# EAGLE board MainBoard_new_print (EAGLE 6.3), part 1 of 2
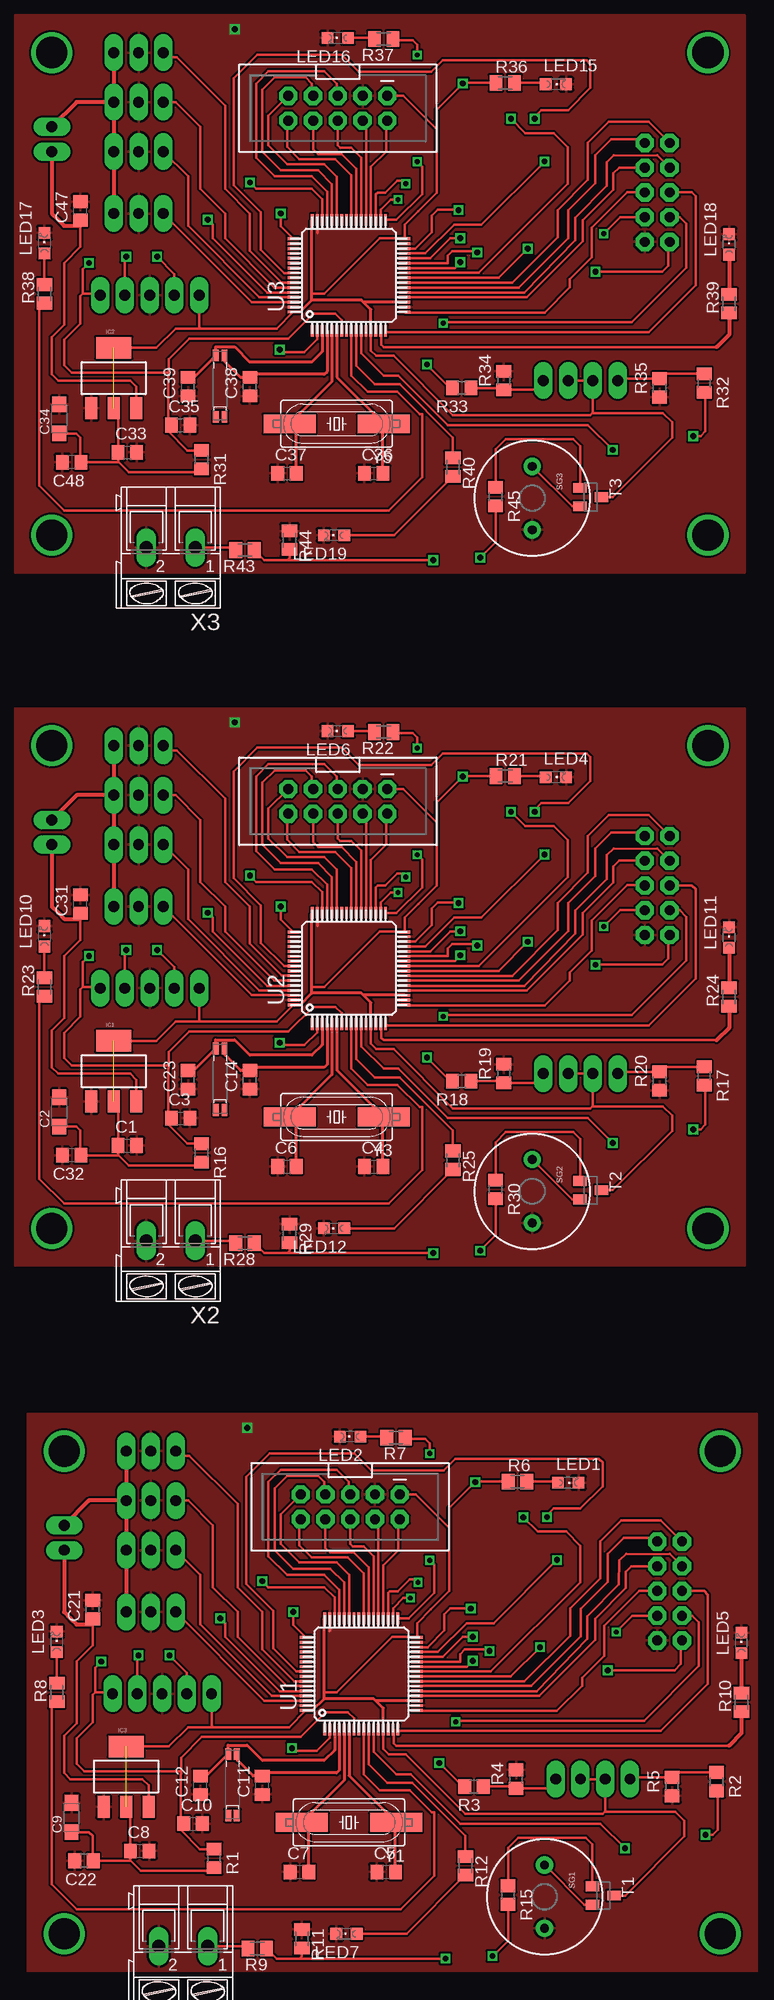
[diagram p0: board, top side]
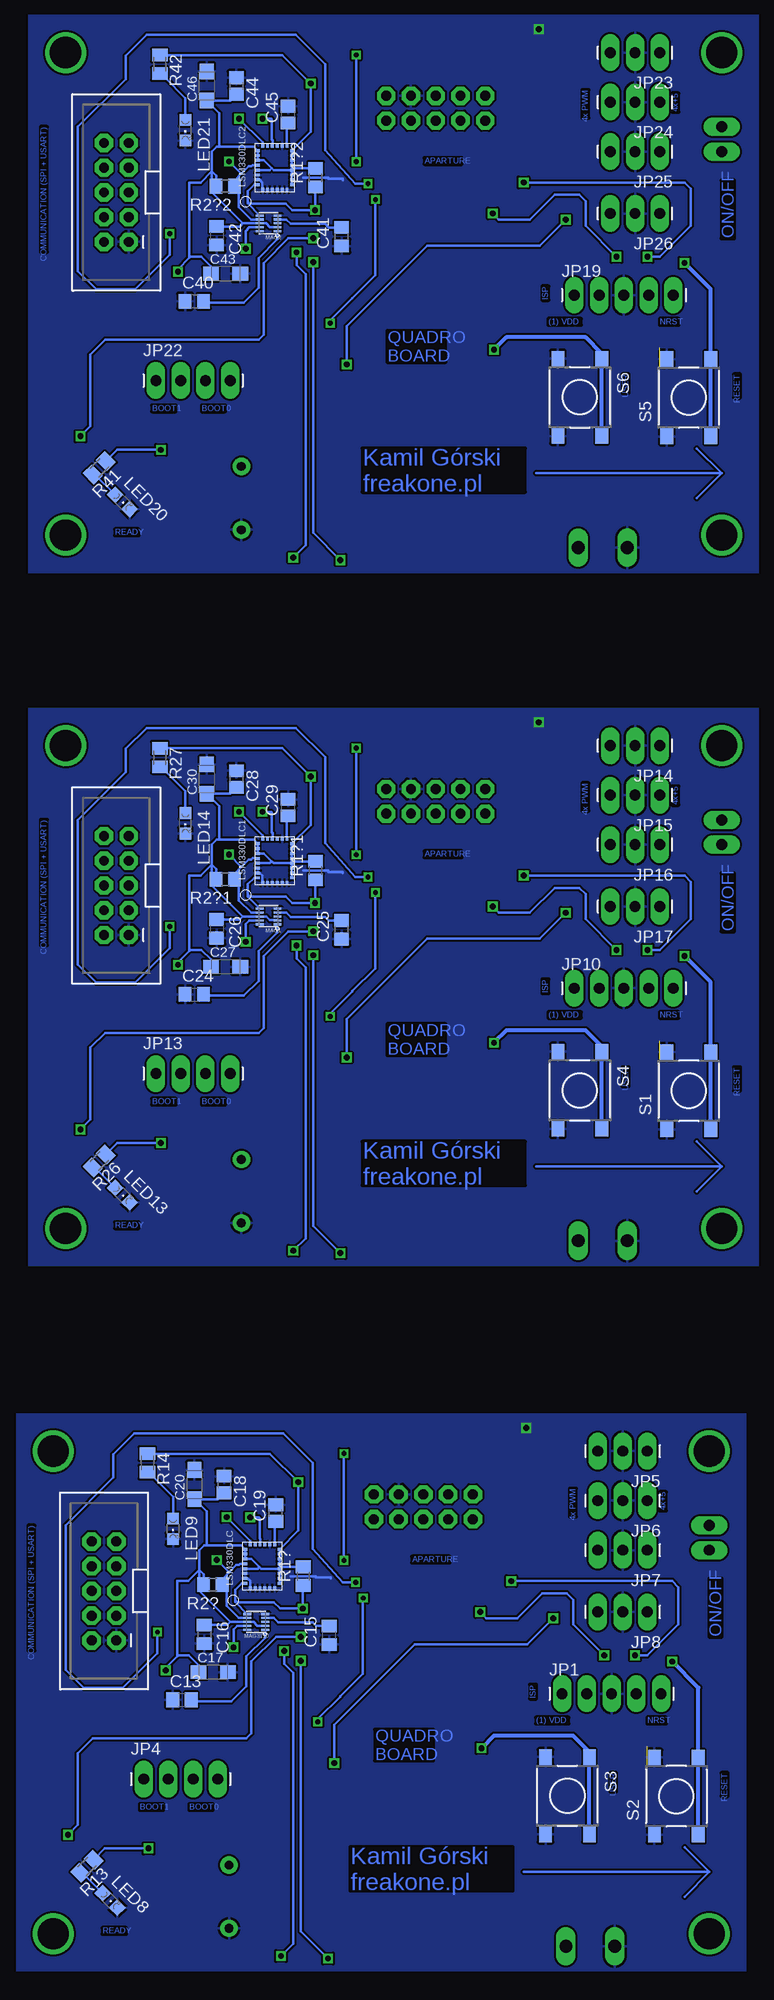
[diagram p1: board, bottom side, seen from below]

No outline drawn. Coordinates in mm, seen from the top.
Copper layers (1*16): Top 0.035mm / dielectric 1.5mm / Bottom 0.035mm
Design rules "default": minimum track width 10mil, minimum drill 24mil, track to track 8mil, track to pad 8mil, pad to pad 8mil, via to via 8mil, smd to smd 8mil, copper to edge 40mil, drill to drill 8mil, minimum pad ring 10mil, minimum via ring 8mil, stop-mask expansion 4mil, vias tented up to drill 0mil, thermal gap 10mil

## Footprints (pad centres in the part's own frame; a part is rotated, then mirrored left to right if it is on the bottom)
C0805 = smd 1.3 x 1.5: 1 -0.95,0; 2 0.95,0
SMC_A = smd 1.6 x 1.4: + -1.5,0; - 1.5,0
C0805' = smd 1.3 x 1.5: 1 -0.85,0; 2 0.85,0
SOT223 = smd 1.219 x 2.235: 1 -2.311,-3.099; 2 0,-3.099; 3 2.311,-3.099 | smd 3.6 x 2.2: 4 0,3.099
1X05_LONGPADS = drill 1.118 pad 1.88 long: 1 0,0; 2 2.54,0; 3 5.08,0; 4 7.62,0; 5 10.16,0
2X5-SHROUDED = drill 1.016 pad 1.88 octagon: 1 -1.27,5.08; 2 1.27,5.08; 3 -1.27,2.54; 4 1.27,2.54; 5 -1.27,0; 6 1.27,0; 7 -1.27,-2.54; 8 1.27,-2.54; 9 -1.27,-5.08; 10 1.27,-5.08
1X04_LONGPADS = drill 1.118 pad 1.88 long: 1 0,0; 2 2.54,0; 3 5.08,0; 4 7.62,0
1X03_LONGPADS = drill 1.118 pad 1.88 long: 1 0,0; 2 2.54,0; 3 5.08,0
1X02_LONGPADS = drill 1.118 pad 1.88 long: 1 0,0; 2 2.54,0
CHIPLED_0805 = smd 1.2 x 1.2: A 0,-1.05; C 0,1.05
LGA_4X5X1P1_28L = smd 0.4 x 0.3: P1 -2.263,1.25; P2 -2.263,0.75; P3 -2.263,0.25; P4 -2.263,-0.25; P5 -2.263,-0.75; P6 -2.263,-1.25; P15 2.263,-1.25; P16 2.263,-0.75; P17 2.263,-0.25; P18 2.263,0.25; P19 2.263,0.75; P20 2.263,1.25 | smd 0.3 x 0.4: P7 -1.75,-1.762; P8 -1.25,-1.762; P9 -0.75,-1.762; P10 -0.25,-1.762; P11 0.25,-1.762; P12 0.75,-1.762; P13 1.25,-1.762; P14 1.75,-1.762; P21 1.75,1.762; P22 1.25,1.762; P23 0.75,1.762; P24 0.25,1.762; P25 -0.25,1.762; P26 -0.75,1.762; P27 -1.25,1.762; P28 -1.75,1.762
DFN-10 = smd 0.8 x 0.22: 1 -0.91,0.8; 2 -0.91,0.4; 3 -0.91,0; 4 -0.91,-0.4; 5 -0.91,-0.8; 6 0.91,-0.8; 7 0.91,-0.4; 8 0.91,0; 9 0.91,0.4; 10 0.91,0.8
R0805 = smd 1.3 x 1.5: 1 -0.95,0; 2 0.95,0
M0805 = smd 1.3 x 1.6: 1 -0.95,0; 2 0.95,0
DTSM-6 = smd 1.55 x 1.3: 1 -3.975,2.25; 2 3.975,2.25; 3 -3.975,-2.25; 4 3.975,-2.25
BUZZER-12MM = drill 0.9 pad 1.778: + 3.25,0; - -3.25,0
SOT23 = smd 1 x 1.4: 1 -0.95,-1.1; 2 0.95,-1.1; 3 0,1.1
TQFP64 = smd 1.2 x 0.3: 1 -5.7,3.75; 2 -5.7,3.25; 3 -5.7,2.75; 4 -5.7,2.25; 5 -5.7,1.75; 6 -5.7,1.25; 7 -5.7,0.75; 8 -5.7,0.25; 9 -5.7,-0.25; 10 -5.7,-0.75; 11 -5.7,-1.25; 12 -5.7,-1.75; 13 -5.7,-2.25; 14 -5.7,-2.75; 15 -5.7,-3.25; 16 -5.7,-3.75; 33 5.7,-3.75; 34 5.7,-3.25; 35 5.7,-2.75; 36 5.7,-2.25; 37 5.7,-1.75; 38 5.7,-1.25; 39 5.7,-0.75; 40 5.7,-0.25; 41 5.7,0.25; 42 5.7,0.75; 43 5.7,1.25; 44 5.7,1.75; 45 5.7,2.25; 46 5.7,2.75; 47 5.7,3.25; 48 5.7,3.75 | smd 0.3 x 1.2: 17 -3.75,-5.7; 18 -3.25,-5.7; 19 -2.75,-5.7; 20 -2.25,-5.7; 21 -1.75,-5.7; 22 -1.25,-5.7; 23 -0.75,-5.7; 24 -0.25,-5.7; 25 0.25,-5.7; 26 0.75,-5.7; 27 1.25,-5.7; 28 1.75,-5.7; 29 2.25,-5.7; 30 2.75,-5.7; 31 3.25,-5.7; 32 3.75,-5.7; 49 3.75,5.7; 50 3.25,5.7; 51 2.75,5.7; 52 2.25,5.7; 53 1.75,5.7; 54 1.25,5.7; 55 0.75,5.7; 56 0.25,5.7; 57 -0.25,5.7; 58 -0.75,5.7; 59 -1.25,5.7; 60 -1.75,5.7; 61 -2.25,5.7; 62 -2.75,5.7; 63 -3.25,5.7; 64 -3.75,5.7
AK300/2 = drill 1.321 long: 1 -2.515,0; 2 2.489,0
HC49UP = smd 5.334 x 1.93: 1 -4.826,0; 2 4.826,0
CRYSTAL-32KHZ-SMD_EPSON_MC146 = smd 1.2 x 0.6: NC1 6.9,1.2; NC2 6.9,0.3; P$1 0.6,0.3; P$2 0.6,1.2

## Placement (x,y rotation side)
C1  100n  [C0805]  0.13,87.25 0 top
C2  1u  [SMC_A]  -6.86,90.68 90 top
C3  100n  [C0805]  5.59,90.04 0 top
C4  22p  [C0805]  25.4,85.09 0 top
C5  22p  [C0805]  26.67,12.7 0 top
C6  22p  [C0805]  16.51,85.09 0 top
C7  22p  [C0805]  17.78,12.7 0 top
C8  100n  [C0805]  1.4,14.86 0 top
C9  1u  [SMC_A]  -5.59,18.29 90 top
C10  100n  [C0805]  6.86,17.65 0 top
C11  10p  [C0805]  13.97,21.59 90 top
C12  10p  [C0805]  7.62,21.59 90 top
C13  100n  [C0805]  47.75,30.35 0 bottom
C14  10p  [C0805]  12.7,93.98 90 top
C15  100n  [C0805]  32.64,36.98 90 bottom
C16  100n  [C0805]  45.47,37.08 270 bottom
C17  1uF  [SMC_A]  44.54,33.19 0 bottom
C18  100n  [C0805']  43.43,52.45 270 bottom
C19  10n  [C0805']  38.13,49.52 90 bottom
C20  10u  [SMC_A]  46.48,52.45 90 bottom
C21  [C0805]  -3.43,39.62 90 top
C22  [C0805]  -4.32,13.84 180 top
C23  10p  [C0805]  6.35,93.98 90 top
C24  100n  [C0805]  46.48,102.74 0 bottom
C25  100n  [C0805]  31.37,109.37 90 bottom
C26  100n  [C0805]  44.2,109.47 270 bottom
C27  1uF  [SMC_A]  43.27,105.58 0 bottom
C28  100n  [C0805']  42.16,124.84 270 bottom
C29  10n  [C0805']  36.86,121.91 90 bottom
C30  10u  [SMC_A]  45.21,124.84 90 bottom
C31  [C0805]  -4.7,112.01 90 top
C32  [C0805]  -5.59,86.23 180 top
C33  100n  [C0805]  0.13,158.37 0 top
C34  1u  [SMC_A]  -6.86,161.8 90 top
C35  100n  [C0805]  5.59,161.16 0 top
C36  22p  [C0805]  25.4,156.21 0 top
C37  22p  [C0805]  16.51,156.21 0 top
C38  10p  [C0805]  12.7,165.1 90 top
C39  10p  [C0805]  6.35,165.1 90 top
C40  100n  [C0805]  46.48,173.86 0 bottom
C41  100n  [C0805]  31.37,180.49 90 bottom
C42  100n  [C0805]  44.2,180.59 270 bottom
C43  1uF  [SMC_A]  43.27,176.7 0 bottom
C44  100n  [C0805']  42.16,195.96 270 bottom
C45  10n  [C0805']  36.86,193.03 90 bottom
C46  10u  [SMC_A]  45.21,195.96 90 bottom
C47  [C0805]  -4.7,183.13 90 top
C48  [C0805]  -5.59,157.35 180 top
E$1  [A4P-LOC]  -66.04,-54.61 0 top
IC1  [SOT223]  -1.27,94.87 0 top
IC2  [SOT223]  -1.27,165.99 0 top
IC3  [SOT223]  0,22.48 0 top
JP1  [1X05_LONGPADS]  8.76,30.99 0 bottom
JP2  M05X2SHD  [2X5-SHROUDED]  22.99,50.16 270 top
JP3  M05X2SHD  [2X5-SHROUDED]  55.75,41.53 180 bottom
JP4  [1X04_LONGPADS]  51.69,22.23 0 bottom
JP5  [1X03_LONGPADS]  0,55.88 180 bottom
JP6  [1X03_LONGPADS]  0,50.8 180 bottom
JP7  [1X03_LONGPADS]  0,45.72 180 bottom
JP8  [1X03_LONGPADS]  0,39.37 180 bottom
JP9  M02PTH3  [1X02_LONGPADS]  -6.35,48.26 270 top
JP10  [1X05_LONGPADS]  7.49,103.38 0 bottom
JP11  M05X2SHD  [2X5-SHROUDED]  21.72,122.56 270 top
JP12  M05X2SHD  [2X5-SHROUDED]  54.48,113.92 180 bottom
JP13  [1X04_LONGPADS]  50.42,94.61 0 bottom
JP14  [1X03_LONGPADS]  -1.27,128.27 180 bottom
JP15  [1X03_LONGPADS]  -1.27,123.19 180 bottom
JP16  [1X03_LONGPADS]  -1.27,118.11 180 bottom
JP17  [1X03_LONGPADS]  -1.27,111.76 180 bottom
JP18  M02PTH3  [1X02_LONGPADS]  -7.62,120.65 270 top
JP19  [1X05_LONGPADS]  7.49,174.5 0 bottom
JP20  M05X2SHD  [2X5-SHROUDED]  21.72,193.68 270 top
JP21  M05X2SHD  [2X5-SHROUDED]  54.48,185.04 180 bottom
JP22  [1X04_LONGPADS]  50.42,165.74 0 bottom
JP23  [1X03_LONGPADS]  -1.27,199.39 180 bottom
JP24  [1X03_LONGPADS]  -1.27,194.31 180 bottom
JP25  [1X03_LONGPADS]  -1.27,189.23 180 bottom
JP26  [1X03_LONGPADS]  -1.27,182.88 180 bottom
JP27  M02PTH3  [1X02_LONGPADS]  -7.62,191.77 270 top
LED1  [CHIPLED_0805]  45.36,52.64 270 top
LED2  [CHIPLED_0805]  22.99,57.38 90 top
LED3  [CHIPLED_0805]  -7.11,36.32 0 top
LED4  [CHIPLED_0805]  44.09,125.03 270 top
LED5  [CHIPLED_0805]  63.12,36.2 0 top
LED6  [CHIPLED_0805]  21.72,129.77 90 top
LED7  [CHIPLED_0805]  22.61,6.35 90 top
LED8  [CHIPLED_0805]  55.13,9.77 225 bottom
LED9  [CHIPLED_0805]  48.67,47.91 180 bottom
LED10  [CHIPLED_0805]  -8.38,108.71 0 top
LED11  [CHIPLED_0805]  61.85,108.58 0 top
LED12  [CHIPLED_0805]  21.34,78.74 90 top
LED13  [CHIPLED_0805]  53.86,82.16 225 bottom
LED14  [CHIPLED_0805]  47.4,120.3 180 bottom
LED15  [CHIPLED_0805]  44.09,196.15 270 top
LED16  [CHIPLED_0805]  21.72,200.89 90 top
LED17  [CHIPLED_0805]  -8.38,179.83 0 top
LED18  [CHIPLED_0805]  61.85,179.71 0 top
LED19  [CHIPLED_0805]  21.34,149.86 90 top
LED20  [CHIPLED_0805]  53.86,153.28 225 bottom
LED21  [CHIPLED_0805]  47.4,191.42 180 bottom
LSM330DLC  LSM330DLC  [LGA_4X5X1P1_28L]  39.5,44.07 90 bottom
LSM330DLC1  LSM330DLC  [LGA_4X5X1P1_28L]  38.23,116.46 90 bottom
LSM330DLC2  LSM330DLC  [LGA_4X5X1P1_28L]  38.23,187.58 90 bottom
MAG1  MAG3110  [DFN-10]  38.86,110.74 180 bottom
MAG2  MAG3110  [DFN-10]  38.86,181.86 180 bottom
MAG3110  MAG3110  [DFN-10]  40.13,38.35 180 bottom
R1  10k  [R0805]  9.02,14.1 270 top
R1?  4.7k  [R0805]  35.31,43.05 90 bottom
R1?1  4.7k  [R0805]  34.04,115.44 90 bottom
R1?2  4.7k  [R0805]  34.04,186.56 90 bottom
R2  510  [R0805]  60.58,21.97 270 top
R2?  4.7k  [R0805]  44.58,42.16 180 bottom
R2?1  4.7k  [R0805]  43.31,114.55 180 bottom
R2?2  4.7k  [R0805]  43.31,185.67 180 bottom
R3  510  [R0805]  35.69,21.46 180 top
R4  10k  [R0805]  40.01,22.23 90 top
R5  10k  [R0805]  56.01,21.46 90 top
R6  [M0805]  40.16,52.76 0 top
R7  [M0805]  27.69,57.28 180 top
R8  [M0805]  -7.11,31.11 90 top
R9  [M0805]  13.46,4.83 180 top
R10  [M0805]  63.12,30.1 90 top
R11  [M0805]  18.03,5.84 270 top
R12  [M0805]  34.8,13.34 270 top
R13  [M0805]  57.49,13.27 225 bottom
R14  [M0805]  51.29,54.67 270 bottom
R15  [R0805]  39.18,10.33 270 top
R16  10k  [R0805]  7.75,86.49 270 top
R17  510  [R0805]  59.31,94.36 270 top
R18  510  [R0805]  34.42,93.85 180 top
R19  10k  [R0805]  38.73,94.61 90 top
R20  10k  [R0805]  54.74,93.85 90 top
R21  [M0805]  38.89,125.15 0 top
R22  [M0805]  26.42,129.67 180 top
R23  [M0805]  -8.38,103.5 90 top
R24  [M0805]  61.85,102.49 90 top
R25  [M0805]  33.53,85.72 270 top
R26  [M0805]  56.22,85.66 225 bottom
R27  [M0805]  50.02,127.06 270 bottom
R28  [M0805]  12.19,77.22 180 top
R29  [M0805]  16.76,78.23 270 top
R30  [R0805]  37.91,82.72 270 top
R31  10k  [R0805]  7.75,157.61 270 top
R32  510  [R0805]  59.31,165.48 270 top
R33  510  [R0805]  34.42,164.97 180 top
R34  10k  [R0805]  38.73,165.74 90 top
R35  10k  [R0805]  54.74,164.97 90 top
R36  [M0805]  38.89,196.27 0 top
R37  [M0805]  26.42,200.79 180 top
R38  [M0805]  -8.38,174.62 90 top
R39  [M0805]  61.85,173.61 90 top
R40  [M0805]  33.53,156.84 270 top
R41  [M0805]  56.22,156.78 225 bottom
R42  [M0805]  50.02,198.18 270 bottom
R43  [M0805]  12.19,148.34 180 top
R44  [M0805]  16.76,149.35 270 top
R45  [R0805]  37.91,153.84 270 top
S1  DTSM-6  [DTSM-6]  -4.24,92.86 90 bottom
S2  DTSM-6  [DTSM-6]  -2.97,20.47 90 bottom
S3  DTSM-6  [DTSM-6]  8.2,20.51 270 bottom
S4  DTSM-6  [DTSM-6]  6.93,92.9 270 bottom
S5  DTSM-6  [DTSM-6]  -4.24,163.98 90 bottom
S6  DTSM-6  [DTSM-6]  6.93,164.02 270 bottom
SG1  BUZZERPTH  [BUZZER-12MM]  42.93,10.16 270 top
SG2  BUZZERPTH  [BUZZER-12MM]  41.66,82.55 270 top
SG3  BUZZERPTH  [BUZZER-12MM]  41.66,153.67 270 top
T1  BC847  [SOT23]  48.95,10.27 270 top
T2  BC847  [SOT23]  47.68,82.66 270 top
T3  BC847  [SOT23]  47.68,153.78 270 top
U1  STM32F10XRXT6  [TQFP64]  24.13,33.02 90 top
U2  STM32F10XRXT6  [TQFP64]  22.86,105.41 90 top
U3  STM32F10XRXT6  [TQFP64]  22.86,176.53 90 top
X1  [AK300/2]  5.84,5.08 180 top
X2  [AK300/2]  4.57,77.47 180 top
X3  [AK300/2]  4.57,148.59 180 top
Y1  8MHz  [HC49UP]  22.86,17.78 180 top
Y2  32.768kHz  [CRYSTAL-32KHZ-SMD_EPSON_MC146]  10.16,25.4 270 top
Y3  8MHz  [HC49UP]  21.59,90.17 180 top
Y4  32.768kHz  [CRYSTAL-32KHZ-SMD_EPSON_MC146]  8.89,97.79 270 top
Y5  8MHz  [HC49UP]  21.59,161.29 180 top
Y6  32.768kHz  [CRYSTAL-32KHZ-SMD_EPSON_MC146]  8.89,168.91 270 top

## Library data of the parts
C1-C17 C20-C27 C30-C43 C46-C48 R1 R1? R1?1 R1?2 R2 R2? R2?1 R2?2 R3-R5 R15-R20 R30-R35 R45 = rcl
C18 C19 C28 C29 C44 C45 R6-R14 R21-R29 R36-R44 = resistor
E$1 = frames
IC1-IC3 = SparkFun-PowerIC
JP1-JP27 = SparkFun-Connectors
LED1-LED21 = led
LSM330DLC LSM330DLC1 LSM330DLC2 = sensors-akc_zyr
MAG1 MAG2 MAG3110 = sparkfun-sensors (2)
S1-S6 = switch-tact
SG1-SG3 = SparkFun-Electromechanical
T1-T3 = transistor
U1-U3 = stm32
X1-X3 = con-ptr500; OC_FARNELL: unknown; OC_NEWARK: unknown
Y1-Y6 = SparkFun-FreqCtrl

## Nets
3.3V: C8.1 C9.+ C16.1 C17.+ C18.2 C20.+ C22.1 IC3.2 IC3.4 JP1.1 JP2.1 JP3.2 JP4.2 JP4.3 LSM330DLC.P7 LSM330DLC.P8 LSM330DLC.P9 LSM330DLC.P10 LSM330DLC.P11 LSM330DLC.P12 LSM330DLC.P13 LSM330DLC.P14 LSM330DLC.P21 LSM330DLC.P22 LSM330DLC.P23 LSM330DLC.P25 MAG3110.2 MAG3110.8 R1.2 R1?.2 R2?.2 R6.1 R14.1 T1.3 U1.13 U1.19 U1.32 U1.48 U1.64
3.3V1: C1.1 C2.+ C26.1 C27.+ C28.2 C30.+ C32.1 IC1.2 IC1.4 JP10.1 JP11.1 JP12.2 JP13.2 JP13.3 LSM330DLC1.P7 LSM330DLC1.P8 LSM330DLC1.P9 LSM330DLC1.P10 LSM330DLC1.P11 LSM330DLC1.P12 LSM330DLC1.P13 LSM330DLC1.P14 LSM330DLC1.P21 LSM330DLC1.P22 LSM330DLC1.P23 LSM330DLC1.P25 MAG1.2 MAG1.8 R1?1.2 R2?1.2 R16.2 R21.1 R27.1 T2.3 U2.13 U2.19 U2.32 U2.48 U2.64
3.3V2: C33.1 C34.+ C42.1 C43.+ C44.2 C46.+ C48.1 IC2.2 IC2.4 JP19.1 JP20.1 JP21.2 JP22.2 JP22.3 LSM330DLC2.P7 LSM330DLC2.P8 LSM330DLC2.P9 LSM330DLC2.P10 LSM330DLC2.P11 LSM330DLC2.P12 LSM330DLC2.P13 LSM330DLC2.P14 LSM330DLC2.P21 LSM330DLC2.P22 LSM330DLC2.P23 LSM330DLC2.P25 MAG2.2 MAG2.8 R1?2.2 R2?2.2 R31.2 R36.1 R42.1 T3.3 U3.13 U3.19 U3.32 U3.48 U3.64
5V: JP5.1 JP6.1 JP7.1 JP8.1 JP9.1
5V1: JP14.1 JP15.1 JP16.1 JP17.1 JP18.1
5V2: JP23.1 JP24.1 JP25.1 JP26.1 JP27.1
5VREG: C21.1 IC3.3 JP9.2
5VREG1: C31.1 IC1.3 JP18.2
5VREG2: C47.1 IC2.3 JP27.2
A1: JP2.7 U1.44
A2: JP2.5 U1.45
A3: JP2.9 U1.43
A4: JP2.2 U1.36
A5: JP2.8 U1.39
A6: JP2.10 U1.40
A7: JP2.4 U1.37
A8: JP2.6 U1.38
A9: JP11.2 U2.36
A10: JP11.8 U2.39
A11: JP11.10 U2.40
A12: JP11.4 U2.37
A13: JP11.6 U2.38
A14: JP11.7 U2.44
A15: JP11.5 U2.45
A16: JP11.9 U2.43
A17: JP20.2 U3.36
A18: JP20.8 U3.39
A19: JP20.10 U3.40
A20: JP20.4 U3.37
A21: JP20.6 U3.38
A22: JP20.7 U3.44
A23: JP20.5 U3.45
A24: JP20.9 U3.43
BOOT0: R3.2 U1.60
BOOT1: R2.2 U1.28
BOOT2: R18.2 U2.60
BOOT3: R17.2 U2.28
BOOT4: R33.2 U3.60
BOOT5: R32.2 U3.28
BUTTON: S3.1 S3.2 U1.2
BUTTON1: S4.1 S4.2 U2.2
BUTTON2: S6.1 S6.2 U3.2
BUZZ: R15.2 U1.27
BUZZ1: R30.2 U2.27
BUZZ2: R45.2 U3.27
GND: C5.1 C7.1 C8.2 C9.- C10.2 C11.1 C12.1 C13.1 C15.1 C16.2 C17.- C18.1 C19.2 C20.- C21.2 C22.2 IC3.1 JP1.3 JP2.3 JP3.1 JP5.2 JP6.2 JP7.2 JP8.2 LED1.C LED2.C LED3.C LED5.C LED7.C LED8.C LED9.C LSM330DLC.P1 LSM330DLC.P2 LSM330DLC.P3 LSM330DLC.P4 LSM330DLC.P5 LSM330DLC.P6 LSM330DLC.P16 LSM330DLC.P26 LSM330DLC.P27 MAG3110.5 MAG3110.10 R4.2 R5.1 R11.1 S2.1 S2.2 S3.3 S3.4 SG1.+ U1.12 U1.18 U1.31 U1.47 U1.63 X1.2
GND1: C1.2 C2.- C3.2 C4.1 C6.1 C14.1 C23.1 C24.1 C25.1 C26.2 C27.- C28.1 C29.2 C30.- C31.2 C32.2 IC1.1 JP10.3 JP11.3 JP12.1 JP14.2 JP15.2 JP16.2 JP17.2 LED4.C LED6.C LED10.C LED11.C LED12.C LED13.C LED14.C LSM330DLC1.P1 LSM330DLC1.P2 LSM330DLC1.P3 LSM330DLC1.P4 LSM330DLC1.P5 LSM330DLC1.P6 LSM330DLC1.P16 LSM330DLC1.P26 LSM330DLC1.P27 MAG1.5 MAG1.10 R19.2 R20.1 R29.1 S1.1 S1.2 S4.3 S4.4 SG2.+ U2.12 U2.18 U2.31 U2.47 U2.63 X2.2
GND2: C33.2 C34.- C35.2 C36.1 C37.1 C38.1 C39.1 C40.1 C41.1 C42.2 C43.- C44.1 C45.2 C46.- C47.2 C48.2 IC2.1 JP19.3 JP20.3 JP21.1 JP23.2 JP24.2 JP25.2 JP26.2 LED15.C LED16.C LED17.C LED18.C LED19.C LED20.C LED21.C LSM330DLC2.P1 LSM330DLC2.P2 LSM330DLC2.P3 LSM330DLC2.P4 LSM330DLC2.P5 LSM330DLC2.P6 LSM330DLC2.P16 LSM330DLC2.P26 LSM330DLC2.P27 MAG2.5 MAG2.10 R34.2 R35.1 R44.1 S5.1 S5.2 S6.3 S6.4 SG3.+ U3.12 U3.18 U3.31 U3.47 U3.63 X3.2
INT_ACC: LSM330DLC.P20 U1.56
INT_ACC1: LSM330DLC1.P20 U2.56
INT_ACC2: LSM330DLC2.P20 U3.56
INT_GYRO: LSM330DLC.P18 U1.25
INT_GYRO1: LSM330DLC1.P18 U2.25
INT_GYRO2: LSM330DLC2.P18 U3.25
INT_MAG: MAG3110.9 U1.24
INT_MAG1: MAG1.9 U2.24
INT_MAG2: MAG2.9 U3.24
L1: R7.1 U1.33
L2: R8.1 U1.9
L3: R23.1 U2.9
L4: R10.1 U1.15
L5: R24.1 U2.15
L6: R12.1 U1.10
L7: R13.1 U1.11
L8: R25.1 U2.10
L9: R26.1 U2.11
L10: R22.1 U2.33
L11: R38.1 U3.9
L12: R39.1 U3.15
L13: R40.1 U3.10
L14: R41.1 U3.11
L15: R37.1 U3.33
LIPO: R9.1 R11.2 U1.26
LIPO1: R28.1 R29.2 U2.26
LIPO2: R43.1 R44.2 U3.26
MISO: JP3.9 U1.22
MISO1: JP12.9 U2.22
MISO2: JP21.9 U3.22
MOSI: JP3.10 U1.23
MOSI1: JP12.10 U2.23
MOSI2: JP21.10 U3.23
N$1: JP4.1 R2.1 R5.2
N$2: JP4.4 R3.1 R4.1
N$3: C15.2 MAG3110.4
N$4: C13.2 MAG3110.1
N$5: C19.1 LSM330DLC.P15
N$6: LED1.A R6.2
N$7: LED2.A R7.2
N$8: LED3.A R8.2
N$10: LED5.A R10.2
N$12: LED7.A R12.2
N$13: LED8.A R13.2
N$14: LED9.A R14.2
N$17: SG1.- T1.2
N$19: R9.2 X1.1
N$20: R15.1 T1.1
N$21: JP13.1 R17.1 R20.2
N$22: JP13.4 R18.1 R19.1
N$23: C25.2 MAG1.4
N$24: C24.2 MAG1.1
N$25: C29.1 LSM330DLC1.P15
N$26: LED4.A R21.2
N$27: LED6.A R22.2
N$28: LED10.A R23.2
N$29: LED11.A R24.2
N$30: LED12.A R25.2
N$31: LED13.A R26.2
N$32: LED14.A R27.2
N$37: R28.2 X2.1
N$38: SG2.- T2.2
N$39: R30.1 T2.1
N$41: JP22.1 R32.1 R35.2
N$42: JP22.4 R33.1 R34.1
N$43: C41.2 MAG2.4
N$44: C40.2 MAG2.1
N$45: C45.1 LSM330DLC2.P15
N$46: LED15.A R36.2
N$47: LED16.A R37.2
N$48: LED17.A R38.2
N$49: LED18.A R39.2
N$50: LED19.A R40.2
N$51: LED20.A R41.2
N$52: LED21.A R42.2
N$57: R43.2 X3.1
N$58: SG3.- T3.2
N$59: R45.1 T3.1
NRST: C10.1 JP1.5 R1.1 S2.3 S2.4 U1.7
NRST1: C3.1 JP10.5 R16.1 S1.3 S1.4 U2.7
NRST2: C35.1 JP19.5 R31.1 S5.3 S5.4 U3.7
OSC32_IN: C12.2 U1.3 Y2.P$1
OSC32_IN1: C23.2 U2.3 Y4.P$1
OSC32_IN2: C39.2 U3.3 Y6.P$1
OSC32_OUT: C11.2 U1.4 Y2.P$2
OSC32_OUT1: C14.2 U2.4 Y4.P$2
OSC32_OUT2: C38.2 U3.4 Y6.P$2
OSC_IN: C7.2 U1.5 Y1.2
OSC_IN1: C6.2 U2.5 Y3.2
OSC_IN2: C37.2 U3.5 Y5.2
OSC_OUT: C5.2 U1.6 Y1.1
OSC_OUT1: C4.2 U2.6 Y3.1
OSC_OUT2: C36.2 U3.6 Y5.1
OUT1: JP3.3 U1.35
OUT2: JP3.4 U1.34
OUT3: JP12.3 U2.35
OUT4: JP12.4 U2.34
OUT5: JP21.3 U3.35
OUT6: JP21.4 U3.34
REG1: JP5.3 U1.58
REG2: JP6.3 U1.59
REG3: JP7.3 U1.61
REG4: JP8.3 U1.62
REG5: JP14.3 U2.58
REG6: JP15.3 U2.59
REG7: JP16.3 U2.61
REG8: JP17.3 U2.62
REG9: JP23.3 U3.58
REG10: JP24.3 U3.59
REG11: JP25.3 U3.61
REG12: JP26.3 U3.62
RX: JP3.5 U1.17
RX1: JP12.5 U2.17
RX2: JP21.5 U3.17
SCK: JP3.8 U1.21
SCK1: JP12.8 U2.21
SCK2: JP21.8 U3.21
SCL: LSM330DLC.P24 MAG3110.7 R2?.1 U1.29
SCL1: LSM330DLC1.P24 MAG1.7 R2?1.1 U2.29
SCL2: LSM330DLC2.P24 MAG2.7 R2?2.1 U3.29
SDA: LSM330DLC.P28 MAG3110.6 R1?.1 U1.30
SDA1: LSM330DLC1.P28 MAG1.6 R1?1.1 U2.30
SDA2: LSM330DLC2.P28 MAG2.6 R1?2.1 U3.30
SS: JP3.7 U1.20
SS1: JP12.7 U2.20
SS2: JP21.7 U3.20
SWCLK: JP1.2 U1.49
SWCLK1: JP10.2 U2.49
SWCLK2: JP19.2 U3.49
SWDIO: JP1.4 U1.46
SWDIO1: JP10.4 U2.46
SWDIO2: JP19.4 U3.46
TX: JP3.6 U1.16
TX1: JP12.6 U2.16
TX2: JP21.6 U3.16
V_BATT: U1.1
V_BATT1: U2.1
V_BATT2: U3.1

## Tracks (layer width: path | path; a pad name or v marks a point on that pad's centre or on a via)
3.3V  (via drill 0.6)  (1 unrouted)
  Top 0.254: 20.32,31.11 21.59,31.11 27.3,36.83 29.77,36.83 U1.32 29.84,36.78 29.84,38.23 31.24,39.62 31.25,39.62 33.14,41.52 33.14,48.01 | JP2.1 29.72,51.44 33.14,48.01 | 8.89,27.56 6.35,27.56 4.37,25.58 IC3.4 | 8.89,27.56 16.72,27.56 U1.64 | 0,19.18 0.13,19.3 0.08,19.3 IC3.2 0.45,18.93 C8.1 0.45,13.9 | 9.14,13.02 R1.2 8.7,12.83 1.52,12.83 0.45,13.9 | 0.45,13.9 0.39,13.84 C22.1 -3.43,13.9 -3.43,16.38 -3.83,16.79 C9.+ | JP4.3 JP4.2 49.15,18.92 49.1,18.88 | 49.1,18.88 48.9,18.67 34.8,18.67 28.7,24.77 26.92,24.77 26.38,25.31 U1.13 | JP3.2 56.9,36.32 56.9,34.04 56.26,33.4 v49.42,33.4 | 33.14,48.01 33.14,50.03 v35.81,52.7 35.87,52.76 R6.1 | JP1.1 8.76,27.69 8.89,27.56 | T1.3 51.21,10.27 57.28,16.34 57.28,17.93 56.34,18.88 49.1,18.88
  Top 0.305: U1.64 19.11,29.27 20.32,30.48 | 20.32,30.48 20.32,31.11 20.32,38.66 U1.48 | U1.13 26.38,29.5 25.61,30.27 | 20.32,30.48 25.4,30.48 25.61,30.27 | U1.19 25.61,30.27
  Bottom 0.254: 39.81,44.01 40.63,44.82 LSM330DLC.P23 LSM330DLC.P22 LSM330DLC.P21 41.67,46.23 45.21,46.23 | 39.81,44.01 39.62,43.81 39.62,43.82 LSM330DLC.P10 | LSM330DLC.P25 40,43.82 39.81,44.01 | MAG3110.2 39.24,37.97 40.01,37.97 40.39,38.35 MAG3110.8 42.8,38.35 | LSM330DLC.P7 LSM330DLC.P8 LSM330DLC.P9 LSM330DLC.P10 | LSM330DLC.P10 LSM330DLC.P11 | LSM330DLC.P11 LSM330DLC.P12 LSM330DLC.P13 LSM330DLC.P14 35.81,47.74 v35.81,52.7 38.73,55.62 R14.1 | 42.8,38.35 45.97,41.53 45.97,43.69 | 45.97,43.69 45.97,45.72 45.47,46.23 45.21,46.23 | R1?.2 37.42,44 LSM330DLC.P11 | R2?.2 45.53,43.24 45.97,43.69 | 48.26,34.83 48.26,42.55 47.12,42.55 45.97,43.69 | C18.2 44.08,50.95 C20.+ 45.21,49.68 45.21,46.23 | 42.8,38.35 43.12,38.03 C16.1 | C17.+ 46.04,33.91 47.06,34.93 48.15,34.93 48.26,34.83 | v49.42,33.4 49.42,33.67 48.26,34.83
3.3V1  (via drill 0.6)  (1 unrouted)
  Top 0.254: 19.05,103.5 20.32,103.5 26.04,109.22 28.5,109.22 U2.32 28.57,109.17 28.57,110.62 29.97,112.01 29.98,112.01 31.87,113.91 31.87,120.4 | JP11.1 28.45,123.83 31.87,120.4 | 7.62,99.95 5.08,99.95 3.1,97.97 IC1.4 | 7.62,99.95 15.45,99.95 U2.64 | -1.27,91.57 -1.14,91.69 -1.19,91.69 IC1.2 -0.82,91.32 C1.1 -0.82,86.29 | 7.87,85.41 R16.2 7.43,85.22 0.25,85.22 -0.82,86.29 | -0.82,86.29 -0.88,86.23 C32.1 -4.7,86.29 -4.7,88.77 -5.1,89.18 C2.+ | JP13.3 JP13.2 47.88,91.31 47.84,91.27 | 47.84,91.27 47.62,91.06 33.53,91.06 27.43,97.16 25.65,97.16 25.11,97.7 U2.13 | JP12.2 55.63,108.71 55.63,106.43 54.99,105.79 v48.15,105.79 | 31.87,120.4 31.87,122.42 v34.54,125.09 34.6,125.15 R21.1 | JP10.1 7.49,100.08 7.62,99.95 | T2.3 49.94,82.66 56.01,88.73 56.01,90.33 55.06,91.27 47.84,91.27
  Top 0.305: U2.64 17.84,101.66 19.05,102.87 | 19.05,102.87 19.05,103.5 19.05,111.05 U2.48 | U2.13 25.11,101.89 24.34,102.66 | 19.05,102.87 24.13,102.87 24.34,102.66 | U2.19 24.34,102.66
  Bottom 0.254: 38.54,116.39 39.36,117.21 LSM330DLC1.P23 LSM330DLC1.P22 LSM330DLC1.P21 40.4,118.62 43.94,118.62 | 38.54,116.39 38.35,116.2 38.35,116.21 LSM330DLC1.P10 | LSM330DLC1.P25 38.73,116.21 38.54,116.39 | MAG1.2 37.97,110.36 38.73,110.36 39.12,110.74 MAG1.8 41.53,110.74 | LSM330DLC1.P7 LSM330DLC1.P8 LSM330DLC1.P9 LSM330DLC1.P10 | LSM330DLC1.P10 LSM330DLC1.P11 | LSM330DLC1.P11 LSM330DLC1.P12 LSM330DLC1.P13 LSM330DLC1.P14 34.54,120.13 v34.54,125.09 37.46,128.01 R27.1 | 41.53,110.74 44.7,113.92 44.7,116.08 | 44.7,116.08 44.7,118.11 44.2,118.62 43.94,118.62 | R1?1.2 36.15,116.39 LSM330DLC1.P11 | R2?1.2 44.26,115.63 44.7,116.08 | 46.99,107.22 46.99,114.94 45.85,114.94 44.7,116.08 | C28.2 42.81,123.34 C30.+ 43.94,122.07 43.94,118.62 | 41.53,110.74 41.85,110.42 C26.1 | C27.+ 44.77,106.3 45.79,107.32 46.88,107.32 46.99,107.22 | v48.15,105.79 48.15,106.06 46.99,107.22
3.3V2  (via drill 0.6)  (1 unrouted)
  Top 0.254: 19.05,174.62 20.32,174.62 26.04,180.34 28.5,180.34 U3.32 28.57,180.29 28.57,181.74 29.97,183.13 29.98,183.13 31.87,185.03 31.87,191.52 | JP20.1 28.45,194.94 31.87,191.52 | 7.62,171.07 5.08,171.07 3.1,169.09 IC2.4 | 7.62,171.07 15.45,171.07 U3.64 | -1.27,162.69 -1.14,162.81 -1.19,162.81 IC2.2 -0.82,162.44 C33.1 -0.82,157.41 | 7.87,156.53 R31.2 7.43,156.34 0.25,156.34 -0.82,157.41 | -0.82,157.41 -0.88,157.35 C48.1 -4.7,157.41 -4.7,159.89 -5.1,160.3 C34.+ | JP22.3 JP22.2 47.88,162.43 47.84,162.39 | 47.84,162.39 47.62,162.18 33.53,162.18 27.43,168.28 25.65,168.28 25.11,168.82 U3.13 | JP21.2 55.63,179.83 55.63,177.55 54.99,176.91 v48.15,176.91 | 31.87,191.52 31.87,193.54 v34.54,196.22 34.6,196.27 R36.1 | JP19.1 7.49,171.2 7.62,171.07 | T3.3 49.94,153.78 56.01,159.85 56.01,161.44 55.06,162.39 47.84,162.39
  Top 0.305: U3.64 17.84,172.78 19.05,173.99 | 19.05,173.99 19.05,174.62 19.05,182.17 U3.48 | U3.13 25.11,173.01 24.34,173.78 | 19.05,173.99 24.13,173.99 24.34,173.78 | U3.19 24.34,173.78
  Bottom 0.254: 38.54,187.52 39.36,188.33 LSM330DLC2.P23 LSM330DLC2.P22 LSM330DLC2.P21 40.4,189.74 43.94,189.74 | 38.54,187.52 38.35,187.32 38.35,187.33 LSM330DLC2.P10 | LSM330DLC2.P25 38.73,187.33 38.54,187.52 | MAG2.2 37.97,181.48 38.73,181.48 39.12,181.86 MAG2.8 41.53,181.86 | LSM330DLC2.P7 LSM330DLC2.P8 LSM330DLC2.P9 LSM330DLC2.P10 | LSM330DLC2.P10 LSM330DLC2.P11 | LSM330DLC2.P11 LSM330DLC2.P12 LSM330DLC2.P13 LSM330DLC2.P14 34.54,191.25 v34.54,196.22 37.46,199.13 R42.1 | 41.53,181.86 44.7,185.04 44.7,187.2 | 44.7,187.2 44.7,189.23 44.2,189.74 43.94,189.74 | R1?2.2 36.15,187.51 LSM330DLC2.P11 | R2?2.2 44.26,186.75 44.7,187.2 | 46.99,178.34 46.99,186.06 45.85,186.06 44.7,187.2 | C44.2 42.81,194.46 C46.+ 43.94,193.19 43.94,189.74 | 41.53,181.86 41.85,181.54 C42.1 | C43.+ 44.77,177.42 45.79,178.44 46.88,178.44 46.99,178.34 | v48.15,176.91 48.15,177.18 46.99,178.34
5V
  Top 0.406: JP5.1 JP6.1 | JP6.1 JP7.1 JP8.1 | JP6.1 -3.81,50.8 JP9.1
5V1
  Top 0.406: JP14.1 JP15.1 | JP15.1 JP16.1 JP17.1 | JP15.1 -5.08,123.19 JP18.1
5V2
  Top 0.406: JP23.1 JP24.1 | JP24.1 JP25.1 JP26.1 | JP24.1 -5.08,194.31 JP27.1
5VREG
  Top 0.254: IC3.3 2.31,21.59 1.68,22.23 -5.71,22.23 -6.35,22.86 -6.35,26.67 -5.08,27.94 -5.08,34.29 -3.43,35.94 -3.43,38.1 C21.1
  Top 0.406: -3.43,38.1 -5.08,38.1 -5.71,38.73 -6.35,39.37 JP9.2
5VREG1
  Top 0.254: IC1.3 1.04,93.98 0.41,94.61 -6.99,94.61 -7.62,95.25 -7.62,99.06 -6.35,100.33 -6.35,106.68 -4.7,108.33 -4.7,110.49 C31.1
  Top 0.406: -4.7,110.49 -6.35,110.49 -6.99,111.12 -7.62,111.76 JP18.2
5VREG2
  Top 0.254: IC2.3 1.04,165.1 0.41,165.74 -6.99,165.74 -7.62,166.37 -7.62,170.18 -6.35,171.45 -6.35,177.8 -4.7,179.45 -4.7,181.61 C47.1
  Top 0.406: -4.7,181.61 -6.35,181.61 -6.99,182.25 -7.62,182.88 JP27.2
A1
  Top 0.254: U1.44 22.38,42.39 20.95,43.81 17.14,43.81 15.24,45.72 15.24,52.07 16.51,53.34 19.68,53.34 20.32,52.7 20.32,51.56 JP2.7
A2
  Top 0.254: U1.45 21.88,41.62 20.32,43.18 16.51,43.18 14.61,45.09 14.61,52.7 15.88,53.98 21.59,53.98 22.86,52.7 22.86,51.56 JP2.5
A3
  Top 0.254: U1.43 22.88,43.16 21.59,44.45 17.78,44.45 15.88,46.35 15.88,49.4 JP2.9
A4
  Top 0.254: U1.36 26.38,44.16 27.94,45.72 27.94,48.77 JP2.2
A5
  Top 0.254: JP2.8 20.32,48.77 20.45,48.64 20.45,45.97 20.95,45.47 23.37,45.47 24.88,43.95 U1.39
A6
  Top 0.254: JP2.10 17.78,48.77 17.78,46.23 19.05,44.96 22.73,44.96 24.38,43.31 U1.40
A7
  Top 0.254: JP2.4 25.88,48.54 U1.37
A8
  Top 0.254: JP2.6 22.99,46.35 23.24,46.1 24.38,46.1 25.38,45.1 U1.38
A9
  Top 0.254: U2.36 25.11,116.55 26.67,118.11 26.67,121.16 JP11.2
A10
  Top 0.254: JP11.8 19.05,121.16 19.18,121.03 19.18,118.36 19.68,117.86 22.1,117.86 23.61,116.34 U2.39
A11
  Top 0.254: JP11.10 16.51,121.16 16.51,118.62 17.78,117.35 21.46,117.35 23.11,115.7 U2.40
A12
  Top 0.254: JP11.4 24.61,120.93 U2.37
A13
  Top 0.254: JP11.6 21.72,118.75 21.97,118.49 23.11,118.49 24.11,117.5 U2.38
A14
  Top 0.254: U2.44 21.11,114.78 19.68,116.2 15.88,116.2 13.97,118.11 13.97,124.46 15.24,125.73 18.41,125.73 19.05,125.09 19.05,123.95 JP11.7
A15
  Top 0.254: U2.45 20.61,114.01 19.05,115.57 15.24,115.57 13.34,117.47 13.34,125.09 14.61,126.36 20.32,126.36 21.59,125.09 21.59,123.95 JP11.5
A16
  Top 0.254: U2.43 21.61,115.55 20.32,116.84 16.51,116.84 14.61,118.75 14.61,121.79 JP11.9
A17
  Top 0.254: U3.36 25.11,187.67 26.67,189.23 26.67,192.28 JP20.2
A18
  Top 0.254: JP20.8 19.05,192.28 19.18,192.15 19.18,189.48 19.68,188.98 22.1,188.98 23.61,187.46 U3.39
A19
  Top 0.254: JP20.10 16.51,192.28 16.51,189.74 17.78,188.47 21.46,188.47 23.11,186.82 U3.40
A20
  Top 0.254: JP20.4 24.61,192.05 U3.37
A21
  Top 0.254: JP20.6 21.72,189.87 21.97,189.61 23.11,189.61 24.11,188.62 U3.38
A22
  Top 0.254: U3.44 21.11,185.9 19.68,187.32 15.88,187.32 13.97,189.23 13.97,195.58 15.24,196.85 18.41,196.85 19.05,196.22 19.05,195.07 JP20.7
A23
  Top 0.254: U3.45 20.61,185.13 19.05,186.69 15.24,186.69 13.34,188.59 13.34,196.22 14.61,197.49 20.32,197.49 21.59,196.22 21.59,195.07 JP20.5
A24
  Top 0.254: U3.43 21.61,186.67 20.32,187.96 16.51,187.96 14.61,189.87 14.61,192.91 JP20.9
BOOT0  (via drill 0.6)
  Top 0.254: U1.60 18.4,31.24 15.75,31.24 10.16,36.83 10.16,38.23 v9.65,38.73 | v32.13,23.88 34.54,21.46 R3.2
  Bottom 0.254: v9.65,38.73 12.32,36.07 23.88,36.07 32.13,27.81 v32.13,23.88
BOOT1  (via drill 0.6)
  Top 0.254: U1.28 32.48,34.77 34.54,36.83 v35.56,36.83 | v59.44,16.51 60.2,16.51 60.71,17.02 60.71,20.89 R2.2
  Bottom 0.254: v59.44,16.51 58.42,17.53 58.42,24.89 56.9,26.42 41.15,26.42 40.64,26.92 40.64,34.29 38.1,36.83 v35.56,36.83
BOOT2  (via drill 0.6)
  Top 0.254: U2.60 17.13,103.63 14.48,103.63 8.89,109.22 8.89,110.62 v8.38,111.12 | v30.86,96.27 33.27,93.85 R18.2
  Bottom 0.254: v8.38,111.12 11.05,108.46 22.61,108.46 30.86,100.2 v30.86,96.27
BOOT3  (via drill 0.6)
  Top 0.254: U2.28 31.21,107.16 33.27,109.22 v34.29,109.22 | v58.17,88.9 58.93,88.9 59.44,89.41 59.44,93.28 R17.2
  Bottom 0.254: v58.17,88.9 57.15,89.92 57.15,97.28 55.63,98.81 39.88,98.81 39.37,99.31 39.37,106.68 36.83,109.22 v34.29,109.22
BOOT4  (via drill 0.6)
  Top 0.254: U3.60 17.13,174.75 14.48,174.75 8.89,180.34 8.89,181.74 v8.38,182.25 | v30.86,167.39 33.27,164.97 R33.2
  Bottom 0.254: v8.38,182.25 11.05,179.58 22.61,179.58 30.86,171.32 v30.86,167.39
BOOT5  (via drill 0.6)
  Top 0.254: U3.28 31.21,178.28 33.27,180.34 v34.29,180.34 | v58.17,160.02 58.93,160.02 59.44,160.53 59.44,164.4 R32.2
  Bottom 0.254: v58.17,160.02 57.15,161.04 57.15,168.4 55.63,169.93 39.88,169.93 39.37,170.43 39.37,177.8 36.83,180.34 v34.29,180.34
BUTTON  (via drill 0.6)
  Top 0.254: U1.2 20.88,26.47 19.56,25.15 17.27,25.15 v17.02,25.4
  Bottom 0.406: S3.2 S3.1 5.95,25 7.62,26.67 15.75,26.67 v17.02,25.4
BUTTON1  (via drill 0.6)
  Top 0.254: U2.2 19.61,98.86 18.29,97.54 16,97.54 v15.75,97.79
  Bottom 0.406: S4.2 S4.1 4.68,97.39 6.35,99.06 14.48,99.06 v15.75,97.79
BUTTON2  (via drill 0.6)
  Top 0.254: U3.2 19.61,169.98 18.29,168.66 16,168.66 v15.75,168.91
  Bottom 0.406: S6.2 S6.1 4.68,168.51 6.35,170.18 14.48,170.18 v15.75,168.91
BUZZ  (via drill 0.6)
  Top 0.254: U1.27 34.27,34.27 34.27,35.05 34.74,35.52 37.12,35.52 v37.27,35.37 | R15.2 39.18,5.65 v37.59,4.06
  Bottom 0.254: v37.59,4.06 36.32,5.33 36.32,33.12 37.26,34.06 37.26,35.35 v37.27,35.37
BUZZ1  (via drill 0.6)
  Top 0.254: U2.27 33,106.66 33,107.44 33.47,107.91 35.85,107.91 v36.01,107.76 | R30.2 37.91,78.04 v36.32,76.45
  Bottom 0.254: v36.32,76.45 35.05,77.72 35.05,105.51 35.99,106.45 35.99,107.74 v36.01,107.76
BUZZ2  (via drill 0.6)
  Top 0.254: U3.27 33,177.78 33,178.56 33.47,179.03 35.85,179.03 v36.01,178.88 | R45.2 37.91,149.16 v36.32,147.57
  Bottom 0.254: v36.32,147.57 35.05,148.84 35.05,176.63 35.99,177.57 35.99,178.86 v36.01,178.88
GND  (via drill 0.6)
  Top 0.305: U1.47 20.88,37.39
  Bottom 0.254: LSM330DLC.P27 41.04,42.82 40.77,42.55 40.77,41.83 LSM330DLC.P1 | 36.58,43.05 34.04,43.05 34.04,42.93 32.51,42.93 32.51,42.8
  other vias: 12.42,58.27
  pour Top: -10.16,59.69 -10.16,2.54 64.77,2.54 64.77,59.69
  pour Bottom: -10.16,59.69 64.77,59.69 64.77,2.54 -10.16,2.54
GND1  (via drill 0.6)
  Top 0.305: U2.47 19.61,109.78
  Bottom 0.254: LSM330DLC1.P27 39.77,115.21 39.5,114.94 39.5,114.22 LSM330DLC1.P1 | 35.31,115.44 32.77,115.44 32.77,115.32 31.24,115.32 31.24,115.19
  other vias: 11.15,130.66
  pour Top: -11.43,132.08 -11.43,74.93 63.5,74.93 63.5,132.08
  pour Bottom: -11.43,132.08 63.5,132.08 63.5,74.93 -11.43,74.93
GND2  (via drill 0.6)
  Top 0.305: U3.47 19.61,180.9
  Bottom 0.254: LSM330DLC2.P27 39.77,186.33 39.5,186.06 39.5,185.34 LSM330DLC2.P1 | 35.31,186.56 32.77,186.56 32.77,186.44 31.24,186.44 31.24,186.31
  other vias: 11.15,201.78
  pour Top: -11.43,203.2 -11.43,146.05 63.5,146.05 63.5,203.2
  pour Bottom: -11.43,203.2 63.5,203.2 63.5,146.05 -11.43,146.05
INT_ACC  (via drill 0.6)
  Top 0.254: v43.17,49.1 43.17,49.28 43.88,49.98 46.61,49.98 48.88,52.25 48.88,54.7 48.51,55.07 33.75,55.07 32.59,53.91 25.14,53.91 23.38,55.67 14.72,55.67 12.3,53.24 12.3,42.28 15.09,39.48 15.09,35.65 17.47,33.27 U1.56
  Bottom 0.254: LSM330DLC.P20 40.75,46.67 v43.17,49.1
INT_ACC1  (via drill 0.6)
  Top 0.254: v41.9,121.49 41.9,121.67 42.61,122.37 45.34,122.37 47.61,124.64 47.61,127.09 47.24,127.46 32.48,127.46 31.32,126.3 23.87,126.3 22.11,128.06 13.45,128.06 11.03,125.64 11.03,114.67 13.82,111.87 13.82,108.03 16.2,105.66 U2.56
  Bottom 0.254: LSM330DLC1.P20 39.48,119.06 v41.9,121.49
INT_ACC2  (via drill 0.6)
  Top 0.254: v41.9,192.61 41.9,192.79 42.61,193.49 45.34,193.49 47.61,195.76 47.61,198.21 47.24,198.58 32.48,198.58 31.32,197.42 23.87,197.42 22.11,199.18 13.45,199.18 11.03,196.75 11.03,185.79 13.82,182.99 13.82,179.16 16.2,176.78 U3.56
  Bottom 0.254: LSM330DLC2.P20 39.48,190.18 v41.9,192.61
INT_GYRO  (via drill 0.6)
  Top 0.254: U1.25 37.43,33.27 46.58,42.42 46.58,46.17 45.13,47.62 42.22,47.62 v40.76,49.09
  Bottom 0.254: v40.76,49.09 39.88,49.09 39.79,49 39.79,46.95 39.73,46.89 39.73,46.35 LSM330DLC.P18
INT_GYRO1  (via drill 0.6)
  Top 0.254: U2.25 36.16,105.66 45.31,114.81 45.31,118.56 43.86,120.01 40.95,120.01 v39.49,121.48
  Bottom 0.254: v39.49,121.48 38.61,121.48 38.52,121.39 38.52,119.34 38.46,119.28 38.46,118.74 LSM330DLC1.P18
INT_GYRO2  (via drill 0.6)
  Top 0.254: U3.25 36.16,176.78 45.31,185.94 45.31,189.68 43.86,191.13 40.95,191.13 v39.49,192.6
  Bottom 0.254: v39.49,192.6 38.61,192.6 38.52,192.51 38.52,190.46 38.46,190.4 38.46,189.86 LSM330DLC2.P18
INT_MAG  (via drill 0.6)
  Top 0.254: U1.24 39.47,32.77 v42.46,35.76
  Bottom 0.254: MAG3110.9 41.05,37.94 42.09,37.94 42.46,37.58 v42.46,35.76
INT_MAG1  (via drill 0.6)
  Top 0.254: U2.24 38.2,105.16 v41.19,108.15
  Bottom 0.254: MAG1.9 39.78,110.33 40.82,110.33 41.19,109.97 v41.19,108.15
INT_MAG2  (via drill 0.6)
  Top 0.254: U3.24 38.2,176.28 v41.19,179.27
  Bottom 0.254: MAG2.9 39.78,181.45 40.82,181.45 41.19,181.09 v41.19,179.27
L1  (via drill 0.5)
  Top 0.254: U1.33 29,38.72 31.63,41.35 31.63,44.19 v31.14,44.68 | v31.14,55.63 31.14,56.7 30.68,57.15 28.76,57.15 R7.1
  Bottom 0.254: v31.14,44.68 v31.14,55.63
L2
  Top 0.254: U1.9 24.38,22.73 26.04,21.08 29.08,21.08 31.37,18.8 31.62,18.8 31.62,12.32 28.19,8.89 -5.08,8.89 -7.62,11.43 -7.62,29.66 R8.1
L3
  Top 0.254: U2.9 23.11,95.12 24.77,93.47 27.81,93.47 30.1,91.19 30.35,91.19 30.35,84.71 26.92,81.28 -6.35,81.28 -8.89,83.82 -8.89,102.05 R23.1
L4
  Top 0.254: U1.15 27.43,27.27 27.43,25.91 27.69,25.65 61.85,25.65
  Top 0.406: R10.1 63.12,26.92 61.85,25.65
L5
  Top 0.254: U2.15 26.16,99.66 26.16,98.3 26.42,98.04 60.58,98.04
  Top 0.406: R24.1 61.85,99.31 60.58,98.04
L6
  Top 0.254: U1.10 24.89,27.31 24.89,23.75 26.8,21.84 29.34,21.84 34.8,16.38 R12.1
L7  (via drill 0.6)
  Top 0.254: U1.11 25.4,27.3 25.4,25.02 27.69,22.73 29.21,22.73 34.29,17.65 48.64,17.65 v51.18,15.11
  Bottom 0.254: v51.18,15.11 55.65,15.11 R13.1
L8
  Top 0.254: U2.10 23.62,99.7 23.62,96.14 25.53,94.23 28.07,94.23 33.53,88.77 R25.1
L9  (via drill 0.6)
  Top 0.254: U2.11 24.13,99.69 24.13,97.41 26.42,95.12 27.94,95.12 33.02,90.04 47.37,90.04 v49.91,87.5
  Bottom 0.254: v49.91,87.5 54.38,87.5 R26.1
L10  (via drill 0.5)
  Top 0.254: U2.33 27.73,111.11 30.36,113.74 30.36,116.58 v29.86,117.07 | v29.86,128.02 29.86,129.09 29.41,129.54 27.49,129.54 R22.1
  Bottom 0.254: v29.86,117.07 v29.86,128.02
L11
  Top 0.254: U3.9 23.11,166.24 24.77,164.59 27.81,164.59 30.1,162.31 30.35,162.31 30.35,155.83 26.92,152.4 -6.35,152.4 -8.89,154.94 -8.89,173.17 R38.1
L12
  Top 0.254: U3.15 26.16,170.78 26.16,169.42 26.42,169.16 60.58,169.16
  Top 0.406: R39.1 61.85,170.43 60.58,169.16
L13
  Top 0.254: U3.10 23.62,170.82 23.62,167.26 25.53,165.35 28.07,165.35 33.53,159.89 R40.1
L14  (via drill 0.6)
  Top 0.254: U3.11 24.13,170.81 24.13,168.53 26.42,166.24 27.94,166.24 33.02,161.16 47.37,161.16 v49.91,158.62
  Bottom 0.254: v49.91,158.62 54.38,158.62 R41.1
L15  (via drill 0.5)
  Top 0.254: U3.33 27.73,182.23 30.36,184.86 30.36,187.7 v29.86,188.19 | v29.86,199.14 29.86,200.21 29.41,200.66 27.49,200.66 R37.1
  Bottom 0.254: v29.86,188.19 v29.86,199.14
LIPO  (via drill 0.6)
  Top 0.254: v32.77,3.81 17.78,3.81 | 17.78,3.81 15.43,3.81 R9.1 | R11.2 18.03,4.06 17.78,3.81 | U1.26 34.96,33.77 v35.56,34.37
  Bottom 0.254: v32.77,3.81 35.56,6.6 35.56,29.71 35.56,30.23 v35.56,34.37
LIPO1  (via drill 0.6)
  Top 0.254: v31.5,76.2 16.51,76.2 | 16.51,76.2 14.16,76.2 R28.1 | R29.2 16.76,76.45 16.51,76.2 | U2.26 33.69,106.16 v34.29,106.76
  Bottom 0.254: v31.5,76.2 34.29,78.99 34.29,102.1 34.29,102.62 v34.29,106.76
LIPO2  (via drill 0.6)
  Top 0.254: v31.5,147.32 16.51,147.32 | 16.51,147.32 14.16,147.32 R43.1 | R44.2 16.76,147.57 16.51,147.32 | U3.26 33.69,177.28 v34.29,177.88
  Bottom 0.254: v31.5,147.32 34.29,150.11 34.29,173.22 34.29,173.74 v34.29,177.88
MISO
  Top 0.254: JP3.9 54.1,46.99 51.05,46.99 49.41,45.34 49.41,42.48 46.64,39.71 46.64,36.86 41.55,31.77 U1.22
MISO1
  Top 0.254: JP12.9 52.83,119.38 49.78,119.38 48.14,117.73 48.14,114.87 45.37,112.1 45.37,109.25 40.28,104.16 U2.22
MISO2
  Top 0.254: JP21.9 52.83,190.5 49.78,190.5 48.14,188.85 48.14,185.99 45.37,183.22 45.37,180.37 40.28,175.28 U3.22
MOSI
  Top 0.254: JP3.10 54.86,48.77 50.8,48.77 48.65,46.61 48.65,42.84 45.54,39.73 45.54,36.94 40.86,32.26 29.84,32.26 U1.23
MOSI1
  Top 0.254: JP12.10 53.59,121.16 49.53,121.16 47.38,119 47.38,115.23 44.27,112.12 44.27,109.33 39.59,104.65 28.57,104.65 U2.23
MOSI2
  Top 0.254: JP21.10 53.59,192.28 49.53,192.28 47.38,190.12 47.38,186.35 44.27,183.24 44.27,180.45 39.59,175.77 28.57,175.77 U3.23
N$1
  Top 0.254: JP4.1 51.88,22.41 R5.2 56.52,22.92 R2.1
N$2
  Top 0.254: JP4.4 43.12,21.27 R4.1 39.82,21.46 R3.1
N$3
  Bottom 0.254: C15.2 33.98,37.93 34.34,38.3 37.87,38.3 38.32,38.75 MAG3110.4 | MAG3110.4
N$4
  Bottom 0.254: MAG3110.1 39.22,36.72 41.15,34.8 41.15,31.75 42.67,30.23 46.67,30.23 C13.2
N$5
  Bottom 0.254: 38.25,48.75 C19.1 38.25,48.55 LSM330DLC.P15
N$6
  Top 0.254: R6.2 44.19,52.76 LED1.A
N$7
  Top 0.254: LED2.A 26.63,57.38 R7.2
N$8
  Top 0.254: LED3.A R8.2
N$9  (via drill 3.2)
  other vias: -6.35,55.88
N$10
  Top 0.406: LED5.A R10.2
N$11  (via drill 3.2)
  other vias: 60.96,55.88
N$12
  Top 0.254: R12.2 28.76,6.35 LED7.A
N$13
  Bottom 0.254: R13.2 57.96,12.6 LED8.A
N$14
  Bottom 0.254: 51.33,53.75 R14.2 50.91,53.34 50.8,53.34 48.67,51.21 LED9.A
N$15  (via drill 3.2)
  other vias: 60.96,6.35
N$16  (via drill 3.2)
  other vias: -6.35,6.35
N$17
  Top 0.254: T1.2 47.01,9.32 SG1.-
N$18
  Bottom 0.254: -6.35,12.7 12.7,12.7 | -6.35,12.7 -3.81,15.24 | -6.35,12.7 -3.81,10.16
N$19
  Top 0.254: X1.1 12.26,5.08 R9.2
N$20
  Top 0.254: R15.1 39.18,15.17 40.23,16.22 47.13,16.22 47.84,15.52 47.84,11.23 T1.1
N$21
  Top 0.254: JP13.1 50.61,94.8 R20.2 55.24,95.31 R17.1
N$22
  Top 0.254: JP13.4 41.85,93.67 R19.1 38.55,93.85 R18.1
N$23
  Bottom 0.254: C25.2 32.7,110.32 33.08,110.69 36.6,110.69 37.05,111.14 MAG1.4 | MAG1.4
N$24
  Bottom 0.254: MAG1.1 37.95,109.11 39.88,107.19 39.88,104.14 41.4,102.62 45.41,102.62 C24.2
N$25
  Bottom 0.254: 36.98,121.14 C29.1 36.98,120.94 LSM330DLC1.P15
N$26
  Top 0.254: R21.2 42.92,125.15 LED4.A
N$27
  Top 0.254: LED6.A 25.36,129.77 R22.2
N$28
  Top 0.254: LED10.A R23.2
N$29
  Top 0.406: LED11.A R24.2
N$30
  Top 0.254: R25.2 27.49,78.74 LED12.A
N$31
  Bottom 0.254: R26.2 56.69,84.98 LED13.A
N$32
  Bottom 0.254: 50.05,126.14 R27.2 49.65,125.73 49.53,125.73 47.4,123.6 LED14.A
N$33  (via drill 3.2)
  other vias: -7.62,128.27
N$34  (via drill 3.2)
  other vias: 59.69,128.27
N$35  (via drill 3.2)
  other vias: 59.69,78.74
N$36  (via drill 3.2)
  other vias: -7.62,78.74
N$37
  Top 0.254: X2.1 10.99,77.47 R28.2
N$38
  Top 0.254: T2.2 45.74,81.71 SG2.-
N$39
  Top 0.254: R30.1 37.91,87.56 38.96,88.61 45.86,88.61 46.57,87.91 46.57,83.62 T2.1
N$40
  Bottom 0.254: -7.62,85.09 11.43,85.09 | -7.62,85.09 -5.08,87.63 | -7.62,85.09 -5.08,82.55
N$41
  Top 0.254: JP22.1 50.61,165.92 R35.2 55.24,166.43 R32.1
N$42
  Top 0.254: JP22.4 41.85,164.78 R34.1 38.55,164.97 R33.1
N$43
  Bottom 0.254: C41.2 32.7,181.44 33.08,181.81 36.6,181.81 37.05,182.26 MAG2.4 | MAG2.4
N$44
  Bottom 0.254: MAG2.1 37.95,180.23 39.88,178.31 39.88,175.26 41.4,173.74 45.41,173.74 C40.2
N$45
  Bottom 0.254: 36.98,192.26 C45.1 36.98,192.06 LSM330DLC2.P15
N$46
  Top 0.254: R36.2 42.92,196.27 LED15.A
N$47
  Top 0.254: LED16.A 25.36,200.89 R37.2
N$48
  Top 0.254: LED17.A R38.2
N$49
  Top 0.406: LED18.A R39.2
N$50
  Top 0.254: R40.2 27.49,149.86 LED19.A
N$51
  Bottom 0.254: R41.2 56.69,156.1 LED20.A
N$52
  Bottom 0.254: 50.05,197.26 R42.2 49.65,196.85 49.53,196.85 47.4,194.72 LED21.A
N$53  (via drill 3.2)
  other vias: -7.62,199.39
N$54  (via drill 3.2)
  other vias: 59.69,199.39
N$55  (via drill 3.2)
  other vias: 59.69,149.86
N$56  (via drill 3.2)
  other vias: -7.62,149.86
N$57
  Top 0.254: X3.1 10.99,148.59 R43.2
N$58
  Top 0.254: T3.2 45.74,152.83 SG3.-
N$59
  Top 0.254: R45.1 37.91,158.68 38.96,159.73 45.86,159.73 46.57,159.03 46.57,154.74 T3.1
N$60
  Bottom 0.254: -7.62,156.21 11.43,156.21 | -7.62,156.21 -5.08,158.75 | -7.62,156.21 -5.08,153.67
NRST  (via drill 0.6)
  Top 0.254: U1.7 23.38,28.44 22.73,29.08 20.45,29.08 17.91,26.54 7.76,26.54 5.64,24.42 5.64,23.08 | 5.59,17.4 5.59,22.73 5.64,22.79 5.64,23.08 | 5.59,17.4 5.59,17.02 7.56,15.05 R1.1 | C10.1 5.65,17.4 5.59,17.4 | -3.17,31.11 -3.43,30.86 -3.43,28.07 -5.08,26.42 -5.08,23.81 -4.31,23.04 5.6,23.04 5.64,23.08 | -3.17,31.11 -1.52,31.11 JP1.5 | -3.17,31.11 -3.17,33.66 v-2.54,34.29
  Bottom 0.254: -3.56,33.27 v-2.54,34.29
  Bottom 0.406: S2.3 S2.4 -5.22,31.61 v-2.54,34.29
NRST1  (via drill 0.6)
  Top 0.254: U2.7 22.11,100.83 21.46,101.47 19.18,101.47 16.64,98.93 6.49,98.93 4.37,96.81 4.37,95.47 | 4.32,89.79 4.32,95.12 4.37,95.18 4.37,95.47 | 4.32,89.79 4.32,89.41 6.29,87.44 R16.1 | C3.1 4.38,89.79 4.32,89.79 | -4.45,103.5 -4.7,103.25 -4.7,100.46 -6.35,98.81 -6.35,96.2 -5.58,95.43 4.33,95.43 4.37,95.47 | -4.45,103.5 -2.79,103.5 JP10.5 | -4.45,103.5 -4.45,106.05 v-3.81,106.68
  Bottom 0.254: -4.83,105.66 v-3.81,106.68
  Bottom 0.406: S1.3 S1.4 -6.49,104 v-3.81,106.68
NRST2  (via drill 0.6)
  Top 0.254: U3.7 22.11,171.95 21.46,172.59 19.18,172.59 16.64,170.05 6.49,170.05 4.37,167.93 4.37,166.59 | 4.32,160.91 4.32,166.24 4.37,166.3 4.37,166.59 | 4.32,160.91 4.32,160.53 6.29,158.56 R31.1 | C35.1 4.38,160.91 4.32,160.91 | -4.45,174.62 -4.7,174.37 -4.7,171.58 -6.35,169.93 -6.35,167.32 -5.58,166.55 4.33,166.55 4.37,166.59 | -4.45,174.62 -2.79,174.62 JP19.5 | -4.45,174.62 -4.45,177.16 v-3.81,177.8
  Bottom 0.254: -4.83,176.78 v-3.81,177.8
  Bottom 0.406: S5.3 S5.4 -6.49,175.12 v-3.81,177.8
OSC32_IN
  Top 0.305: U1.3 21.38,25.19 20.32,24.13 13.97,24.13 12.4,25.7 10.46,25.7 Y2.P$1 8.2,22.54 C12.2
OSC32_IN1
  Top 0.305: U2.3 20.11,97.58 19.05,96.52 12.7,96.52 11.13,98.09 9.19,98.09 Y4.P$1 6.93,94.93 C23.2
OSC32_IN2
  Top 0.305: U3.3 20.11,168.7 19.05,167.64 12.7,167.64 11.13,169.21 9.19,169.21 Y6.P$1 6.93,166.05 C39.2
OSC32_OUT
  Top 0.305: U1.4 21.88,23.15 21.59,22.86 14.29,22.86 C11.2 13.02,22.54 11.43,24.13 11.43,24.73 Y2.P$2
OSC32_OUT1
  Top 0.305: U2.4 20.61,95.54 20.32,95.25 13.02,95.25 C14.2 11.75,94.93 10.16,96.52 10.16,97.12 Y4.P$2
OSC32_OUT2
  Top 0.305: U3.4 20.61,166.66 20.32,166.37 13.02,166.37 C38.2 11.75,166.05 10.16,167.64 10.16,168.24 Y6.P$2
OSC_IN
  Top 0.305: U1.5 22.38,22.13 Y1.2 18.73,17.08 C7.2
OSC_IN1
  Top 0.305: U2.5 21.11,94.52 Y3.2 17.46,89.47 C6.2
OSC_IN2
  Top 0.305: U3.5 21.11,165.64 Y5.2 17.46,160.59 C37.2
OSC_OUT
  Top 0.305: U1.6 22.88,22.59 Y1.1 27.62,17.71 C5.2
OSC_OUT1
  Top 0.305: U2.6 21.61,94.98 Y3.1 26.35,90.1 C4.2
OSC_OUT2
  Top 0.305: U3.6 21.61,166.1 Y5.1 26.35,161.22 C36.2
OUT1  (via drill 0.5)
  Top 0.254: JP3.3 51.94,38.99 v50.27,37.31 | U1.35 26.88,41.33 27.06,41.51 27.84,41.51 29.08,42.74 29.61,42.74 v29.94,42.42
  Bottom 0.254: v50.27,37.31 50.27,35.13 53.81,31.59 57.84,31.59 59.69,33.44 59.69,48.26 54.78,53.17 54.78,55.56 52.66,57.69 37.34,57.69 34.34,54.69 34.34,45.86 31.24,42.42 v29.94,42.42
OUT2  (via drill 0.5)
  Top 0.254: JP3.4 58.08,38.99 58.74,38.32 58.74,33.82 53.14,28.22 33.92,28.22 v33.81,28.11 | v29.16,40.8 28.42,40.8 27.39,39.76 U1.34
  Bottom 0.254: v33.81,28.11 33.81,28.4 31.54,30.68 31.54,30.69 29.21,33.02 29.21,40.76 v29.16,40.8
OUT3  (via drill 0.5)
  Top 0.254: JP12.3 50.67,111.38 v49,109.7 | U2.35 25.61,113.72 25.79,113.9 26.57,113.9 27.81,115.14 28.34,115.14 v28.67,114.81
  Bottom 0.254: v49,109.7 49,107.52 52.54,103.98 56.57,103.98 58.42,105.83 58.42,120.65 53.51,125.56 53.51,127.95 51.39,130.08 36.07,130.08 33.07,127.08 33.07,118.25 29.97,114.81 v28.67,114.81
OUT4  (via drill 0.5)
  Top 0.254: JP12.4 56.8,111.38 57.47,110.71 57.47,106.21 51.87,100.61 32.65,100.61 v32.54,100.5 | v27.89,113.19 27.15,113.19 26.12,112.15 U2.34
  Bottom 0.254: v32.54,100.5 32.54,100.79 30.27,103.06 30.27,103.08 27.94,105.41 27.94,113.15 v27.89,113.19
OUT5  (via drill 0.5)
  Top 0.254: JP21.3 50.67,182.5 v49,180.82 | U3.35 25.61,184.84 25.79,185.02 26.57,185.02 27.81,186.25 28.34,186.25 v28.67,185.93
  Bottom 0.254: v49,180.82 49,178.64 52.54,175.1 56.57,175.1 58.42,176.95 58.42,191.77 53.51,196.68 53.51,199.07 51.39,201.2 36.07,201.2 33.07,198.2 33.07,189.37 29.97,185.93 v28.67,185.93
OUT6  (via drill 0.5)
  Top 0.254: JP21.4 56.8,182.5 57.47,181.83 57.47,177.33 51.87,171.73 32.65,171.73 v32.54,171.62 | v27.89,184.31 27.15,184.31 26.12,183.27 U3.34
  Bottom 0.254: v32.54,171.62 32.54,171.91 30.27,174.19 30.27,174.2 27.94,176.53 27.94,184.27 v27.89,184.31
REG1
  Top 0.254: U1.58 17.26,32.27 13.97,35.56 13.97,39.37 11.43,41.91 11.43,49.53 11.44,49.54 11.44,50.44 6.48,55.4 5.56,55.4 JP5.3
REG2
  Top 0.254: U1.59 16.49,31.77 11.43,36.83 11.43,39.37 8.89,41.91 8.89,48.26 6.35,50.8 JP6.3
REG3
  Top 0.254: U1.61 14.95,30.77 7.62,38.1 7.62,43.18 JP7.3
REG4
  Top 0.254: U1.62 14.18,30.27 JP8.3
REG5
  Top 0.254: U2.58 15.99,104.66 12.7,107.95 12.7,111.76 10.16,114.3 10.16,121.92 10.17,121.93 10.17,122.83 5.21,127.79 4.29,127.79 JP14.3
REG6
  Top 0.254: U2.59 15.22,104.16 10.16,109.22 10.16,111.76 7.62,114.3 7.62,120.65 5.08,123.19 JP15.3
REG7
  Top 0.254: U2.61 13.68,103.16 6.35,110.49 6.35,115.57 JP16.3
REG8
  Top 0.254: U2.62 12.91,102.66 JP17.3
REG9
  Top 0.254: U3.58 15.99,175.78 12.7,179.07 12.7,182.88 10.16,185.42 10.16,193.04 10.17,193.05 10.17,193.95 5.21,198.91 4.29,198.91 JP23.3
REG10
  Top 0.254: U3.59 15.22,175.28 10.16,180.34 10.16,182.88 7.62,185.42 7.62,191.77 5.08,194.31 JP24.3
REG11
  Top 0.254: U3.61 13.68,174.28 6.35,181.61 6.35,186.69 JP25.3
REG12
  Top 0.254: U3.62 12.91,173.78 JP26.3
RX
  Top 0.254: U1.17 29.89,29.21 44.19,29.21 46.79,31.81 46.79,32.62 49.04,34.87 49.04,37.94 52.66,41.56 54.45,41.56 JP3.5
RX1
  Top 0.254: U2.17 28.62,101.6 42.92,101.6 45.52,104.2 45.52,105.01 47.77,107.26 47.77,110.33 51.4,113.95 53.18,113.95 JP12.5
RX2
  Top 0.254: U3.17 28.62,172.72 42.92,172.72 45.52,175.32 45.52,176.13 47.77,178.38 47.77,181.44 51.4,185.07 53.18,185.07 JP21.5
SCK
  Top 0.2: 51.29,45.34 55.76,45.34
  Top 0.254: U1.21 29.86,31.24 42.1,31.24 47.33,36.6 47.33,38.95 50.56,42.21 50.59,44.65 51.29,45.34 | 55.76,45.34 JP3.8
SCK1
  Top 0.2: 50.02,117.73 54.49,117.73
  Top 0.254: U2.21 28.59,103.63 40.83,103.63 46.06,108.99 46.06,111.34 49.29,114.6 49.32,117.03 50.02,117.73 | 54.49,117.73 JP12.8
SCK2
  Top 0.2: 50.02,188.85 54.49,188.85
  Top 0.254: U3.21 28.59,174.75 40.83,174.75 46.06,180.11 46.06,182.46 49.29,185.72 49.32,188.16 50.02,188.85 | 54.49,188.85 JP21.8
SCL  (via drill 0.6)
  Top 0.254: U1.29 31.97,35.27 34.92,38.23 37.72,38.23 v44.2,44.7
  Bottom 0.254: MAG3110.7 41.93,38.75 43.18,40.01 43.18,43.18 | 43.18,43.18 42.93,43.43 | 42.93,43.43 42.16,44.2 41.91,44.2 41.78,44.32 LSM330DLC.P24 | v44.2,44.7 42.93,43.43 | R2?.1 43.63,42.73 43.18,43.18
SCL1  (via drill 0.6)
  Top 0.254: U2.29 30.7,107.66 33.66,110.62 36.45,110.62 v42.93,117.09
  Bottom 0.254: MAG1.7 40.66,111.14 41.91,112.39 41.91,115.57 | 41.91,115.57 41.66,115.82 | 41.66,115.82 40.89,116.59 40.64,116.59 40.51,116.71 LSM330DLC1.P24 | v42.93,117.09 41.66,115.82 | R2?1.1 42.36,115.12 41.91,115.57
SCL2  (via drill 0.6)
  Top 0.254: U3.29 30.7,178.78 33.66,181.74 36.45,181.74 v42.93,188.21
  Bottom 0.254: MAG2.7 40.66,182.26 41.91,183.51 41.91,186.69 | 41.91,186.69 41.66,186.94 | 41.66,186.94 40.89,187.71 40.64,187.71 40.51,187.83 LSM330DLC2.P24 | v42.93,188.21 41.66,186.94 | R2?2.1 42.36,186.24 41.91,186.69
SDA  (via drill 0.6)
  Top 0.254: U1.30 30.94,35.77 32.64,37.47 32.64,39.16 33.25,39.77 35.32,39.77 v35.37,39.72
  Bottom 0.254: LSM330DLC.P28 41.63,42.32 42.29,41.66 42.29,40.64 | 42.29,40.64 42.29,40.4 MAG3110.6 | 42.29,40.64 42.04,40.39 38.35,40.39 37.69,39.72 v35.37,39.72 35.37,42.04 R1?.1 35.31,42.04
SDA1  (via drill 0.6)
  Top 0.254: U2.30 29.67,108.16 31.37,109.86 31.37,111.55 31.98,112.16 34.05,112.16 v34.1,112.11
  Bottom 0.254: LSM330DLC1.P28 40.36,114.71 41.02,114.05 41.02,113.03 | 41.02,113.03 41.02,112.79 MAG1.6 | 41.02,113.03 40.77,112.78 37.08,112.78 36.42,112.11 v34.1,112.11 34.1,114.43 R1?1.1 34.04,114.43
SDA2  (via drill 0.6)
  Top 0.254: U3.30 29.67,179.28 31.37,180.97 31.37,182.67 31.98,183.28 34.05,183.28 v34.1,183.23
  Bottom 0.254: LSM330DLC2.P28 40.36,185.83 41.02,185.17 41.02,184.15 | 41.02,184.15 41.02,183.91 MAG2.6 | 41.02,184.15 40.77,183.9 37.08,183.9 36.42,183.23 v34.1,183.23 34.1,185.55 R1?2.1 34.04,185.55
SS
  Top 0.254: JP3.7 51.84,44.07 51.24,43.48 51.24,41.83 48.1,38.68 48.1,36.5 42.37,30.77 U1.20
SS1
  Top 0.254: JP12.7 50.57,116.46 49.98,115.87 49.98,114.22 46.83,111.07 46.83,108.89 41.1,103.16 U2.20
SS2
  Top 0.254: JP21.7 50.57,187.58 49.98,186.99 49.98,185.34 46.83,182.19 46.83,180.01 41.1,174.28 U3.20
SWCLK  (via drill 0.6)
  Top 0.254: JP1.2 6.22,33.15 v4.45,34.92 | v17.14,39.37 17.14,38.05 U1.49
  Bottom 0.254: v17.14,39.37 16.51,38.73 13.34,38.73 10.79,41.27 8.26,41.27 7.62,40.64 7.62,38.1 v4.45,34.92
SWCLK1  (via drill 0.6)
  Top 0.254: JP10.2 4.95,105.54 v3.17,107.31 | v15.88,111.76 15.88,110.44 U2.49
  Bottom 0.254: v15.88,111.76 15.24,111.12 12.06,111.12 9.53,113.67 6.99,113.67 6.35,113.03 6.35,110.49 v3.17,107.31
SWCLK2  (via drill 0.6)
  Top 0.254: JP19.2 4.95,176.66 v3.17,178.44 | v15.88,182.88 15.88,181.56 U3.49
  Bottom 0.254: v15.88,182.88 15.24,182.25 12.06,182.25 9.53,184.78 6.99,184.78 6.35,184.15 6.35,181.61 v3.17,178.44
SWDIO  (via drill 0.6)
  Top 0.254: JP1.4 1.14,34.8 v1.27,34.92 | U1.46 21.38,40.85 20.32,41.91 14.61,41.91 v13.97,42.55
  Bottom 0.254: v1.27,34.92 0,34.92 -3.17,38.1 -3.17,41.91 -2.54,42.55 v13.97,42.55
SWDIO1  (via drill 0.6)
  Top 0.254: JP10.4 -0.13,107.19 v0,107.31 | U2.46 20.11,113.24 19.05,114.3 13.34,114.3 v12.7,114.94
  Bottom 0.254: v0,107.31 -1.27,107.31 -4.45,110.49 -4.45,114.3 -3.81,114.94 v12.7,114.94
SWDIO2  (via drill 0.6)
  Top 0.254: JP19.4 -0.13,178.31 v0,178.44 | U3.46 20.11,184.36 19.05,185.42 13.34,185.42 v12.7,186.06
  Bottom 0.254: v0,178.44 -1.27,178.44 -4.45,181.61 -4.45,185.42 -3.81,186.06 v12.7,186.06
TX
  Top 0.254: U1.16 28.02,27.18 54.86,27.18 59.69,32 59.69,41.15 59.31,41.53 JP3.6
TX1
  Top 0.254: U2.16 26.75,99.57 53.59,99.57 58.42,104.39 58.42,113.54 58.04,113.92 JP12.6
TX2
  Top 0.254: U3.16 26.75,170.69 53.59,170.69 58.42,175.51 58.42,184.66 58.04,185.04 JP21.6